# Altium PCB WX0.011.441PCB-4.2.PcbDoc (part 2 of 2)
Units mil, origin at the board's own origin, x right, y up, seen from the top; angles counter-clockwise.
Board outline 2922.34 x 6952.07 mil, 2 copper layers (Top Layer, Bottom Layer), stack 62.192 mil thick; 87 components, 60 nets, 354 pads, 196 vias.
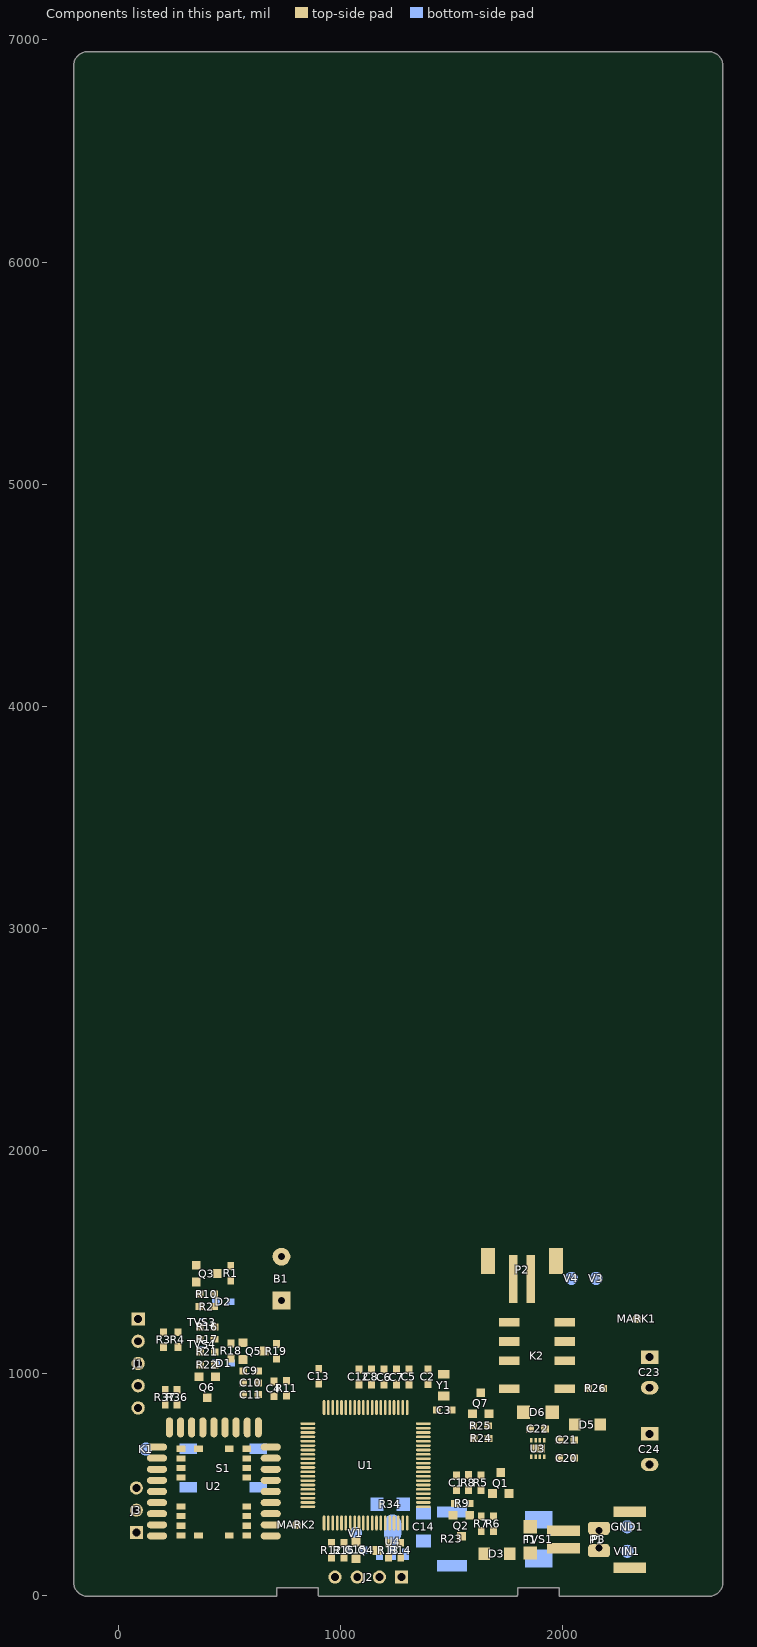
[diagram p2: the components of this part, seen from the top]

## Keep-outs
Keep-Out Layer:
  circle w5: c798,5374.03 r39.37
  circle w5: c2177,6777.03 r39.37
  circle w5: c798,3629.02 r39.37
  circle w5: c2177,5032.02 r39.37
  circle w5: c798,1884.01 r39.37
  circle w5: c2177,3287.01 r39.37
  circle w5: c2177,1542 r39.37
  circle w5: c798,139 r39.37
  circle w5: c2177,1542 r39.37
  circle w5: c798,139 r39.37
  circle w5: c2177,1542 r39.37
  circle w5: c798,139 r39.37
  lines w10: -196.31,59.97 -196.31,6882.02 cw(c-137.31,6882.99) -138.25,6941.98 ; -196.31,60.01 ccw(c-137.31,59.04) -138.25,0.05 ; -138.25,0 0,0 ; -138.25,6942.03 0,6942.03 0,0 ; 0.01,1369.01 104.73,1369.01 ; 0.01,1824.01 cw(c12.01,1759.01) 77.99,1755.07 ; 0.01,3114.01 104.73,3114.01 ; 0.01,3569.01 cw(c12.01,3504.01) 78,3500.08 ; 0.02,4859.02 104.74,4859.02 ; 0.02,5314.02 cw(c12.02,5249.02) 78,5245.08 ; 0.99,6942.03 79.03,6942.03 97.03,6942.03 2520.01,6942.03 ; 79.01,1755.07 79.01,1707.01 97.01,1707.01 2449.01,1707.01 2449.01,2097.01 2518.68,2097.01 ; 79.01,3500.08 79.01,3452.01 97.01,3452.01 2449.01,3452.01 2449.01,3842.01 2518.69,3842.01 ; 79.02,5245.08 79.02,5197.02 97.02,5197.02 2449.02,5197.02 2449.02,5587.02 2518.7,5587.02 ; 104.76,1368.65 ccw(c94.68,1487.2) 213.25,1477.28 213.24,1667.2 972.77,1667.21 972.77,1366.24 982.01,1357.01 1023.01,1357.01 1048.01,1332.01 1048.01,1191.01 1070.01,1169.01 1446.01,1169.01 1465.01,1188.01 1465.01,1322.01 1497.24,1354.24 1529.24,1354.24 1541.01,1366.01 1541.01,1667.01 2306.44,1667.01 2306.44,1479.08 ccw(c2425.01,1489.01) 2414.93,1370.46 ; 104.76,3113.66 ccw(c94.69,3232.21) 213.25,3222.28 213.25,3412.21 972.78,3412.21 972.78,3111.25 982.01,3102.01 1023.01,3102.01 1048.01,3077.01 1048.01,2936.01 1070.01,2914.01 1446.01,2914.01 1465.01,2933.01 1465.01,3067.01 1497.25,3099.25 1529.25,3099.25 1541.01,3111.01 1541.01,3412.01 2306.45,3412.01 2306.45,3224.09 ccw(c2425.01,3234.01) 2414.94,3115.46 ; 104.77,4858.67 ccw(c94.7,4977.22) 213.26,4967.29 213.26,5157.22 972.78,5157.22 972.78,4856.26 982.02,4847.02 1023.02,4847.02 1048.02,4822.02 1048.02,4681.02 1070.02,4659.02 1446.02,4659.02 1465.02,4678.02 1465.02,4812.02 1497.26,4844.26 1529.26,4844.26 1541.02,4856.02 1541.02,5157.01 2306.46,5157.01 2306.46,4969.09 ccw(c2425.02,4979.02) 2414.95,4860.47 ; 1541.03,6902.23 1541.03,6601.03 ; 2400.01,0.01 2519.68,0.01 ; 2414.96,1370.81 2519.68,1370.81 ; 2414.97,3115.82 2519.69,3115.82 ; 2414.98,4860.83 2519.7,4860.83 ; 2519.7,1745 2519.7,2182.7 ; 2519.71,3490.01 2519.71,3927.71 ; 2519.72,5235.02 2519.72,5672.72 ; 2657.94,-0.01 2519.69,-0.01 ; 2657.94,0.04 ccw(c2657.01,59.03) 2716,60 ; 2657.93,6941.98 cw(c2656.99,6882.99) 2715.99,6882.02 ; 2657.93,6942.03 2519.68,6942.03 2519.68,0.01 ; 2716,59.96 2716,6882.02 ; -0.01,141.82 0,141.81 ; -0.01,141.82 0,141.81 ; -0.01,141.82 0,141.81 ; -0.01,141.82 0,141.81 ; -0.01,141.82 0,141.81 ; -0.01,141.82 0,141.81 ; -0.01,141.82 0,141.81 ; -0.01,141.82 0,141.81 ; 0,0 129.92,0 ; 0.01,141.82 31.5,141.82 ; 0,141.81 31.5,141.81 ; 0.01,141.82 31.5,141.82 ; 0,141.81 31.5,141.81 ; 0,141.81 31.5,141.81 ; 0.01,141.82 31.5,141.82 ; 0.01,141.82 31.5,141.82 ; 0.01,1318.01 8.56,1326.56 ; 0,1318 8.55,1326.55 ; 0.01,1318.01 8.56,1326.56 ; 0,1318 8.55,1326.55 ; 0.01,1318.01 8.56,1326.56 ; 0,1318 8.55,1326.55 ; 0.01,1318.01 8.56,1326.56 ; 0,1318 8.55,1326.55 ; 0.01,1318.01 8.56,1326.56 ; 0,1318 8.55,1326.55 ; 0.01,1318.01 8.56,1326.56 ; 0,1318 8.55,1326.55 ; 0.01,1318.01 8.56,1326.56 ; 0,1318 8.55,1326.55 ; 0.01,1318.01 8.56,1326.56 ; 0,1318 8.55,1326.55 ; 0.03,6553.03 0.03,5376.84 31.53,5376.84 cw(c31.53,5278.42) 129.95,5278.42 129.95,5235.03 708.69,5235.03 708.69,5274.4 905.54,5274.4 905.54,5235.03 1791.37,5235.03 1791.37,5274.4 1988.22,5274.4 1988.22,5235.03 2404.03,5235.03 2404.03,5641.8 2510.8,5641.8 2519.72,5650.72 2519.72,5672.72 ; 0.03,6553.03 8.58,6561.58 ; 0.03,6553.03 8.58,6561.58 ; 8.56,1326.56 141.74,1326.56 ; 8.55,1326.55 141.73,1326.55 ; 8.56,1326.56 141.74,1326.56 ; 8.55,1326.55 141.73,1326.55 ; 8.56,1326.56 141.74,1326.56 ; 8.55,1326.55 141.73,1326.55 ; 8.56,1326.56 141.74,1326.56 ; 8.55,1326.55 141.73,1326.55 ; 8.56,1326.56 141.74,1326.56 ; 8.55,1326.55 141.73,1326.55 ; 8.56,1326.56 141.74,1326.56 ; 8.55,1326.55 141.73,1326.55 ; 8.56,1326.56 141.74,1326.56 ; 8.55,1326.55 141.73,1326.55 ; 8.56,1326.56 141.74,1326.56 ; 8.55,1326.55 141.73,1326.55 ; 8.58,6561.58 141.76,6561.58 ; 8.58,6561.58 141.76,6561.58 ; 31.5,141.82 cw(c31.5,43.39) 129.93,43.39 ; 31.5,141.81 cw(c31.5,43.39) 129.92,43.39 ; 31.5,141.82 cw(c31.5,43.39) 129.93,43.39 ; 31.5,141.81 cw(c31.5,43.39) 129.92,43.39 ; 31.5,141.82 cw(c31.5,43.39) 129.93,43.39 ; 31.5,141.81 cw(c31.5,43.39) 129.92,43.39 ; 31.5,141.82 cw(c31.5,43.39) 129.93,43.39 ; 31.5,141.81 cw(c31.5,43.39) 129.92,43.39 ; 31.5,141.82 cw(c31.5,43.39) 129.93,43.39 ; 31.5,141.81 cw(c31.5,43.39) 129.92,43.39 ; 31.5,141.82 cw(c31.5,43.39) 129.93,43.39 ; 31.5,141.81 cw(c31.5,43.39) 129.92,43.39 ; 31.5,141.82 cw(c31.5,43.39) 129.93,43.39 ; 31.5,141.81 cw(c31.5,43.39) 129.92,43.39 ; 31.5,141.82 cw(c31.5,43.39) 129.93,43.39 ; 31.5,141.81 cw(c31.5,43.39) 129.92,43.39 ; 129.93,0.01 129.93,43.39 ; 129.93,0.01 708.67,0.01 ; 129.92,0 129.92,43.39 ; 129.92,0 708.66,0 ; 129.93,0.01 129.93,43.39 ; 129.93,0.01 708.67,0.01 ; 129.92,0 129.92,43.39 ; 129.92,0 708.66,0 ; 129.93,0.01 129.93,43.39 ; 129.93,0.01 708.67,0.01 ; 129.92,0 129.92,43.39 ; 129.92,0 708.66,0 ; 129.93,0.01 129.93,43.39 ; 129.93,0.01 708.67,0.01 ; 129.92,0 129.92,43.39 ; 129.92,0 708.66,0 ; 129.93,0.01 129.93,43.39 ; 129.93,0.01 708.67,0.01 ; 129.92,0 129.92,43.39 ; 129.92,0 708.66,0 ; 129.93,0.01 129.93,43.39 ; 129.93,0.01 708.67,0.01 ; 129.92,0 129.92,43.39 ; 129.92,0 708.66,0 ; 129.93,0.01 129.93,43.39 ; 129.93,0.01 708.67,0.01 ; 129.92,0 129.92,43.39 ; 129.92,0 708.66,0 ; 129.93,0.01 129.93,43.39 ; 129.93,0.01 708.67,0.01 ; 129.92,0 129.92,43.39 ; 129.92,0 708.66,0 ; 141.74,1326.56 158.73,1327.81 ; 141.73,1326.55 158.72,1327.81 ; 141.74,1326.56 158.73,1327.81 ; 141.73,1326.55 158.72,1327.81 ; 141.74,1326.56 158.73,1327.81 ; 141.73,1326.55 158.72,1327.81 ; 141.74,1326.56 158.73,1327.81 ; 141.73,1326.55 158.72,1327.81 ; 141.74,1326.56 158.73,1327.81 ; 141.73,1326.55 158.72,1327.81 ; 141.74,1326.56 158.73,1327.81 ; 141.73,1326.55 158.72,1327.81 ; 141.74,1326.56 158.73,1327.81 ; 141.73,1326.55 158.72,1327.81 ; 141.74,1326.56 158.73,1327.81 ; 141.73,1326.55 158.72,1327.81 ; 141.76,6561.58 158.75,6562.84 ; 141.76,6561.58 158.75,6562.84 ; 158.73,1327.81 175.3,1331.79 ; 158.72,1327.81 175.29,1331.79 ; 158.73,1327.81 175.3,1331.79 ; 158.72,1327.81 175.29,1331.79 ; 158.73,1327.81 175.3,1331.79 ; 158.72,1327.81 175.29,1331.79 ; 158.73,1327.81 175.3,1331.79 ; 158.72,1327.81 175.29,1331.79 ; 158.73,1327.81 175.3,1331.79 ; 158.72,1327.81 175.29,1331.79 ; 158.73,1327.81 175.3,1331.79 ; 158.72,1327.81 175.29,1331.79 ; 158.73,1327.81 175.3,1331.79 ; 158.72,1327.81 175.29,1331.79 ; 158.73,1327.81 175.3,1331.79 ; 158.72,1327.81 175.29,1331.79 ; 158.75,6562.84 175.32,6566.81 ; 158.75,6562.84 175.32,6566.81 ; 175.29,1331.79 191.04,1338.31 ; 175.29,1331.79 191.04,1338.31 ; 175.29,1331.79 191.04,1338.31 ; 175.29,1331.79 191.04,1338.31 ; 175.29,1331.79 191.04,1338.31 ; 175.29,1331.79 191.04,1338.31 ; 175.29,1331.79 191.04,1338.31 ; 175.29,1331.79 191.04,1338.31 ; 175.3,1331.79 191.04,1338.31 ; 175.3,1331.79 191.04,1338.31 ; 175.3,1331.79 191.04,1338.31 ; 175.3,1331.79 191.04,1338.31 ; 175.3,1331.79 191.04,1338.31 ; 175.3,1331.79 191.04,1338.31 ; 175.3,1331.79 191.04,1338.31 ; 175.3,1331.79 191.04,1338.31 ; 175.32,6566.81 191.07,6573.34 ; 175.32,6566.81 191.07,6573.34 ; 191.04,1338.31 205.57,1347.22 ; 191.04,1338.31 205.57,1347.21 ; 191.04,1338.31 205.57,1347.22 ; 191.04,1338.31 205.57,1347.21 ; 191.04,1338.31 205.57,1347.22 ; 191.04,1338.31 205.57,1347.21 ; 191.04,1338.31 205.57,1347.22 ; 191.04,1338.31 205.57,1347.21 ; 191.04,1338.31 205.57,1347.22 ; 191.04,1338.31 205.57,1347.21 ; 191.04,1338.31 205.57,1347.22 ; 191.04,1338.31 205.57,1347.21 ; 191.04,1338.31 205.57,1347.22 ; 191.04,1338.31 205.57,1347.21 ; 191.04,1338.31 205.57,1347.22 ; 191.04,1338.31 205.57,1347.21 ; 191.07,6573.34 205.6,6582.24 ; 191.07,6573.34 205.6,6582.24 ; 205.57,1347.22 218.53,1358.29 ; 205.57,1347.21 218.53,1358.28 ; 205.57,1347.22 218.53,1358.29 ; 205.57,1347.21 218.53,1358.28 ; 205.57,1347.22 218.53,1358.29 ; 205.57,1347.21 218.53,1358.28 ; 205.57,1347.22 218.53,1358.29 ; 205.57,1347.21 218.53,1358.28 ; 205.57,1347.22 218.53,1358.29 ; 205.57,1347.21 218.53,1358.28 ; 205.57,1347.22 218.53,1358.29 ; 205.57,1347.21 218.53,1358.28 ; 205.57,1347.22 218.53,1358.29 ; 205.57,1347.21 218.53,1358.28 ; 205.57,1347.22 218.53,1358.29 ; 205.57,1347.21 218.53,1358.28 ; 205.6,6582.24 218.55,6593.31 ; 205.6,6582.24 218.55,6593.31 ; 213.27,6712.3 cw(c94.7,6722.23) 104.78,6603.67 ccw(c94.7,6722.23) 213.27,6712.3 ; 213.27,6712.3 213.27,6902.23 ; 213.27,6712.3 213.27,6902.23 ; 213.27,6902.23 972.79,6902.23 ; 218.53,1358.29 229.6,1371.24 ; 218.53,1358.28 229.59,1371.24 ; 218.53,1358.29 229.6,1371.24 ; 218.53,1358.28 229.59,1371.24 ; 218.53,1358.29 229.6,1371.24 ; 218.53,1358.28 229.59,1371.24 ; 218.53,1358.29 229.6,1371.24 ; 218.53,1358.28 229.59,1371.24 ; 218.53,1358.29 229.6,1371.24 ; 218.53,1358.28 229.59,1371.24 ; 218.53,1358.29 229.6,1371.24 ; 218.53,1358.28 229.59,1371.24 ; 218.53,1358.29 229.6,1371.24 ; 218.53,1358.28 229.59,1371.24 ; 218.53,1358.29 229.6,1371.24 ; 218.53,1358.28 229.59,1371.24 ; 218.55,6593.31 229.62,6606.27 ; 218.55,6593.31 229.62,6606.27 ; 229.59,1371.24 238.5,1385.77 ; 229.59,1371.24 238.5,1385.77 ; 229.59,1371.24 238.5,1385.77 ; 229.59,1371.24 238.5,1385.77 ; 229.59,1371.24 238.5,1385.77 ; 229.59,1371.24 238.5,1385.77 ; 229.59,1371.24 238.5,1385.77 ; 229.59,1371.24 238.5,1385.77 ; 229.6,1371.24 238.5,1385.78 ; 229.6,1371.24 238.5,1385.78 ; 229.6,1371.24 238.5,1385.78 ; 229.6,1371.24 238.5,1385.78 ; 229.6,1371.24 238.5,1385.78 ; 229.6,1371.24 238.5,1385.78 ; 229.6,1371.24 238.5,1385.78 ; 229.6,1371.24 238.5,1385.78 ; 229.62,6606.27 238.53,6620.8 ; 229.62,6606.27 238.53,6620.8 ; 238.5,1385.77 245.02,1401.51 ; 238.5,1385.77 245.02,1401.51 ; 238.5,1385.77 245.02,1401.51 ; 238.5,1385.77 245.02,1401.51 ; 238.5,1385.77 245.02,1401.51 ; 238.5,1385.77 245.02,1401.51 ; 238.5,1385.77 245.02,1401.51 ; 238.5,1385.77 245.02,1401.51 ; 238.5,1385.78 245.03,1401.52 ; 238.5,1385.78 245.03,1401.52 ; 238.5,1385.78 245.03,1401.52 ; 238.5,1385.78 245.03,1401.52 ; 238.5,1385.78 245.03,1401.52 ; 238.5,1385.78 245.03,1401.52 ; 238.5,1385.78 245.03,1401.52 ; 238.5,1385.78 245.03,1401.52 ; 238.53,6620.8 245.05,6636.54 ; 238.53,6620.8 245.05,6636.54 ; 245.03,1401.52 249,1418.09 ; 245.02,1401.51 249,1418.08 ; 245.03,1401.52 249,1418.09 ; 245.02,1401.51 249,1418.08 ; 245.03,1401.52 249,1418.09 ; 245.02,1401.51 249,1418.08 ; 245.03,1401.52 249,1418.09 ; 245.02,1401.51 249,1418.08 ; 245.03,1401.52 249,1418.09 ; 245.02,1401.51 249,1418.08 ; 245.03,1401.52 249,1418.09 ; 245.02,1401.51 249,1418.08 ; 245.03,1401.52 249,1418.09 ; 245.02,1401.51 249,1418.08 ; 245.03,1401.52 249,1418.09 ; 245.02,1401.51 249,1418.08 ; 245.05,6636.54 249.03,6653.11 ; 245.05,6636.54 249.03,6653.11 ; 249,1418.09 250.01,1435.08 ; 249,1418.08 250,1435.07 ; 249,1418.09 250.01,1435.08 ; 249,1418.08 250,1435.07 ; 249,1418.09 250.01,1435.08 ; 249,1418.08 250,1435.07 ; 249,1418.09 250.01,1435.08 ; 249,1418.08 250,1435.07 ; 249,1418.09 250.01,1435.08 ; 249,1418.08 250,1435.07 ; 249,1418.09 250.01,1435.08 ; 249,1418.08 250,1435.07 ; 249,1418.09 250.01,1435.08 ; 249,1418.08 250,1435.07 ; 249,1418.09 250.01,1435.08 ; 249,1418.08 250,1435.07 ; 249.03,6653.11 250.03,6670.1 ; 249.03,6653.11 250.03,6670.1 ; 250.01,1435.08 250.01,1619.01 ; 250,1435.07 250,1619 ; 250.01,1435.08 250.01,1619.01 ; 250,1435.07 250,1619 ; 250.01,1435.08 250.01,1619.01 ; 250,1435.07 250,1619 ; 250.01,1435.08 250.01,1619.01 ; 250,1435.07 250,1619 ; 250.01,1435.08 250.01,1619.01 ; 250,1435.07 250,1619 ; 250.01,1435.08 250.01,1619.01 ; 250,1435.07 250,1619 ; 250.01,1435.08 250.01,1619.01 ; 250,1435.07 250,1619 ; 250.01,1435.08 250.01,1619.01 ; 250,1435.07 250,1619 ; 250.01,1619.01 261.01,1630.01 ; 250,1619 261,1630 ; 250.01,1619.01 261.01,1630.01 ; 250,1619 261,1630 ; 250.01,1619.01 261.01,1630.01 ; 250,1619 261,1630 ; 250.01,1619.01 261.01,1630.01 ; 250,1619 261,1630 ; 250.01,1619.01 261.01,1630.01 ; 250,1619 261,1630 ; 250.01,1619.01 261.01,1630.01 ; 250,1619 261,1630 ; 250.01,1619.01 261.01,1630.01 ; 250,1619 261,1630 ; 250.01,1619.01 261.01,1630.01 ; 250,1619 261,1630 ; 250.03,6670.1 250.03,6854.03 ; 250.03,6670.1 250.03,6854.03 ; 250.03,6854.03 261.03,6865.03 ; 250.03,6854.03 261.03,6865.03 ; 261.01,1630.01 915.01,1630.01 ; 261,1630 915,1630 ; 261.01,1630.01 915.01,1630.01 ; 261,1630 915,1630 ; 261.01,1630.01 915.01,1630.01 ; 261,1630 915,1630 ; 261.01,1630.01 915.01,1630.01 ; 261,1630 915,1630 ; 261.01,1630.01 915.01,1630.01 ; 261,1630 915,1630 ; 261.01,1630.01 915.01,1630.01 ; 261,1630 915,1630 ; 261.01,1630.01 915.01,1630.01 ; 261,1630 915,1630 ; 261.01,1630.01 915.01,1630.01 ; 261,1630 915,1630 ; 261.03,6865.03 915.03,6865.03 ; 261.03,6865.03 915.03,6865.03 ; 708.67,0.01 708.67,39.38 ; 708.66,0 708.66,39.37 ; 708.67,0.01 708.67,39.38 ; 708.66,0 708.66,39.37 ; 708.67,0.01 708.67,39.38 ; 708.66,0 708.66,39.37 ; 708.67,0.01 708.67,39.38 ; 708.66,0 708.66,39.37 ; 708.67,0.01 708.67,39.38 ; 708.66,0 708.66,39.37 ; 708.67,0.01 708.67,39.38 ; 708.66,0 708.66,39.37 ; 708.67,0.01 708.67,39.38 ; 708.66,0 708.66,39.37 ; 708.67,0.01 708.67,39.38 ; 708.66,0 708.66,39.37 ; 708.66,39.37 905.51,39.37 ; 708.66,39.37 905.51,39.37 ; 708.66,39.37 905.51,39.37 ; 708.66,39.37 905.51,39.37 ; 708.66,39.37 905.51,39.37 ; 708.66,39.37 905.51,39.37 ; 708.66,39.37 905.51,39.37 ; 708.66,39.37 905.51,39.37 ; 708.67,39.38 905.52,39.38 ; 708.67,39.38 905.52,39.38 ; 708.67,39.38 905.52,39.38 ; 708.67,39.38 905.52,39.38 ; 708.67,39.38 905.52,39.38 ; 708.67,39.38 905.52,39.38 ; 708.67,39.38 905.52,39.38 ; 708.67,39.38 905.52,39.38 ; 905.52,0.01 905.52,39.38 ; 905.52,0.01 1791.35,0.01 ; 905.51,0 905.51,39.37 ; 905.51,0 1791.34,0 ; 905.52,0.01 905.52,39.38 ; 905.52,0.01 1791.35,0.01 ; 905.51,0 905.51,39.37 ; 905.51,0 1791.34,0 ; 905.52,0.01 905.52,39.38 ; 905.52,0.01 1791.35,0.01 ; 905.51,0 905.51,39.37 ; 905.51,0 1791.34,0 ; 905.52,0.01 905.52,39.38 ; 905.52,0.01 1791.35,0.01 ; 905.51,0 905.51,39.37 ; 905.51,0 1791.34,0 ; 905.52,0.01 905.52,39.38 ; 905.52,0.01 1791.35,0.01 ; 905.51,0 905.51,39.37 ; 905.51,0 1791.34,0 ; 905.52,0.01 905.52,39.38 ; 905.52,0.01 1791.35,0.01 ; 905.51,0 905.51,39.37 ; 905.51,0 1791.34,0 ; 905.52,0.01 905.52,39.38 ; 905.52,0.01 1791.35,0.01 ; 905.51,0 905.51,39.37 ; 905.51,0 1791.34,0 ; 905.52,0.01 905.52,39.38 ; 905.52,0.01 1791.35,0.01 ; 905.51,0 905.51,39.37 ; 905.51,0 1791.34,0 ; 915.01,1630.01 925.2,1619.81 ; 915,1630 925.2,1619.8 ; 915.01,1630.01 925.2,1619.81 ; 915,1630 925.2,1619.8 ; 915.01,1630.01 925.2,1619.81 ; 915,1630 925.2,1619.8 ; 915.01,1630.01 925.2,1619.81 ; 915,1630 925.2,1619.8 ; 915.01,1630.01 925.2,1619.81 ; 915,1630 925.2,1619.8 ; 915.01,1630.01 925.2,1619.81 ; 915,1630 925.2,1619.8 ; 915.01,1630.01 925.2,1619.81 ; 915,1630 925.2,1619.8 ; 915.01,1630.01 925.2,1619.81 ; 915,1630 925.2,1619.8 ; 915.03,6865.03 925.23,6854.83 ; 915.03,6865.03 925.23,6854.83 ; 925.2,1326.81 936.97,1315.05 ; 925.2,1326.81 925.2,1619.81 ; 925.2,1326.8 936.96,1315.04 ; 925.2,1326.8 925.2,1619.8 ; 925.2,1326.81 936.97,1315.05 ; 925.2,1326.81 925.2,1619.81 ; 925.2,1326.8 936.96,1315.04 ; 925.2,1326.8 925.2,1619.8 ; 925.2,1326.81 936.97,1315.05 ; 925.2,1326.81 925.2,1619.81 ; 925.2,1326.8 936.96,1315.04 ; 925.2,1326.8 925.2,1619.8 ; 925.2,1326.81 936.97,1315.05 ; 925.2,1326.81 925.2,1619.81 ; 925.2,1326.8 936.96,1315.04 ; 925.2,1326.8 925.2,1619.8 ; 925.2,1326.81 936.97,1315.05 ; 925.2,1326.81 925.2,1619.81 ; 925.2,1326.8 936.96,1315.04 ; 925.2,1326.8 925.2,1619.8 ; 925.2,1326.81 936.97,1315.05 ; 925.2,1326.81 925.2,1619.81 ; 925.2,1326.8 936.96,1315.04 ; 925.2,1326.8 925.2,1619.8 ; 925.2,1326.81 936.97,1315.05 ; 925.2,1326.81 925.2,1619.81 ; 925.2,1326.8 936.96,1315.04 ; 925.2,1326.8 925.2,1619.8 ; 925.2,1326.81 936.97,1315.05 ; 925.2,1326.81 925.2,1619.81 ; 925.2,1326.8 936.96,1315.04 ; 925.2,1326.8 925.2,1619.8 ; 925.23,6561.83 925.23,6854.83 ; 925.23,6561.83 936.99,6550.07 ; 925.23,6561.83 936.99,6550.07 ; 925.23,6561.83 925.23,6854.83 ; 936.97,1315.05 991.97,1315.05 ; 936.96,1315.04 991.96,1315.04 ; 936.97,1315.05 991.97,1315.05 ; 936.96,1315.04 991.96,1315.04 ; 936.97,1315.05 991.97,1315.05 ; 936.96,1315.04 991.96,1315.04 ; 936.97,1315.05 991.97,1315.05 ; 936.96,1315.04 991.96,1315.04 ; 936.97,1315.05 991.97,1315.05 ; 936.96,1315.04 991.96,1315.04 ; 936.97,1315.05 991.97,1315.05 ; 936.96,1315.04 991.96,1315.04 ; 936.97,1315.05 991.97,1315.05 ; 936.96,1315.04 991.96,1315.04 ; 936.97,1315.05 991.97,1315.05 ; 936.96,1315.04 991.96,1315.04 ; 936.99,6550.07 991.99,6550.07 ; 936.99,6550.07 991.99,6550.07 ; 972.79,6601.27 972.79,6902.23 ; 972.79,6601.27 982.03,6592.03 ; 972.79,6601.27 982.03,6592.03 ; 972.79,6601.27 972.79,6902.23 ; 982.03,6592.03 1023.03,6592.03 ; 982.03,6592.03 1023.03,6592.03 ; 991.97,1315.05 1003.94,1303.07 ; 991.96,1315.04 1003.94,1303.06 ; 991.97,1315.05 1003.94,1303.07 ; 991.96,1315.04 1003.94,1303.06 ; 991.97,1315.05 1003.94,1303.07 ; 991.96,1315.04 1003.94,1303.06 ; 991.97,1315.05 1003.94,1303.07 ; 991.96,1315.04 1003.94,1303.06 ; 991.97,1315.05 1003.94,1303.07 ; 991.96,1315.04 1003.94,1303.06 ; 991.97,1315.05 1003.94,1303.07 ; 991.96,1315.04 1003.94,1303.06 ; 991.97,1315.05 1003.94,1303.07 ; 991.96,1315.04 1003.94,1303.06 ; 991.97,1315.05 1003.94,1303.07 ; 991.96,1315.04 1003.94,1303.06 ; 991.99,6550.07 1003.97,6538.09 ; 991.99,6550.07 1003.97,6538.09 ; 1003.94,1166.07 1045.96,1124.06 ; 1003.94,1166.07 1003.94,1303.07 ; 1003.94,1166.06 1045.95,1124.05 ; 1003.94,1166.06 1003.94,1303.06 ; 1003.94,1166.07 1045.96,1124.06 ; 1003.94,1166.07 1003.94,1303.07 ; 1003.94,1166.06 1045.95,1124.05 ; 1003.94,1166.06 1003.94,1303.06 ; 1003.94,1166.07 1045.96,1124.06 ; 1003.94,1166.07 1003.94,1303.07 ; 1003.94,1166.06 1045.95,1124.05 ; 1003.94,1166.06 1003.94,1303.06 ; 1003.94,1166.07 1045.96,1124.06 ; 1003.94,1166.07 1003.94,1303.07 ; 1003.94,1166.06 1045.95,1124.05 ; 1003.94,1166.06 1003.94,1303.06 ; 1003.94,1166.07 1045.96,1124.06 ; 1003.94,1166.07 1003.94,1303.07 ; 1003.94,1166.06 1045.95,1124.05 ; 1003.94,1166.06 1003.94,1303.06 ; 1003.94,1166.07 1045.96,1124.06 ; 1003.94,1166.07 1003.94,1303.07 ; 1003.94,1166.06 1045.95,1124.05 ; 1003.94,1166.06 1003.94,1303.06 ; 1003.94,1166.07 1045.96,1124.06 ; 1003.94,1166.07 1003.94,1303.07 ; 1003.94,1166.06 1045.95,1124.05 ; 1003.94,1166.06 1003.94,1303.06 ; 1003.94,1166.07 1045.96,1124.06 ; 1003.94,1166.07 1003.94,1303.07 ; 1003.94,1166.06 1045.95,1124.05 ; 1003.94,1166.06 1003.94,1303.06 ; 1003.97,6401.09 1003.97,6538.09 ; 1003.97,6401.09 1045.98,6359.08 ; 1003.97,6401.09 1045.98,6359.08 ; 1003.97,6401.09 1003.97,6538.09 ; 1023.03,6592.03 1048.03,6567.03 ; 1023.03,6592.03 1048.03,6567.03 ; 1045.96,1124.06 1476.06,1124.06 ; 1045.95,1124.05 1476.05,1124.05 ; 1045.96,1124.06 1476.06,1124.06 ; 1045.95,1124.05 1476.05,1124.05 ; 1045.96,1124.06 1476.06,1124.06 ; 1045.95,1124.05 1476.05,1124.05 ; 1045.96,1124.06 1476.06,1124.06 ; 1045.95,1124.05 1476.05,1124.05 ; 1045.96,1124.06 1476.06,1124.06 ; 1045.95,1124.05 1476.05,1124.05 ; 1045.96,1124.06 1476.06,1124.06 ; 1045.95,1124.05 1476.05,1124.05 ; 1045.96,1124.06 1476.06,1124.06 ; 1045.95,1124.05 1476.05,1124.05 ; 1045.96,1124.06 1476.06,1124.06 ; 1045.95,1124.05 1476.05,1124.05 ; 1045.98,6359.08 1476.08,6359.08 ; 1045.98,6359.08 1476.08,6359.08 ; 1048.03,6426.03 1070.03,6404.03 ; 1048.03,6426.03 1048.03,6567.03 ; 1048.03,6426.03 1048.03,6567.03 ; 1048.03,6426.03 1070.03,6404.03 ; 1070.03,6404.03 1446.03,6404.03 ; 1070.03,6404.03 1446.03,6404.03 ; 1446.03,6404.03 1465.03,6423.03 ; 1446.03,6404.03 1465.03,6423.03 ; 1465.03,6423.03 1465.03,6557.03 ; 1465.03,6423.03 1465.03,6557.03 ; 1465.03,6557.03 1497.27,6589.27 ; 1465.03,6557.03 1497.27,6589.27 ; 1476.06,1124.06 1515.76,1163.76 ; 1476.05,1124.05 1515.75,1163.75 ; 1476.06,1124.06 1515.76,1163.76 ; 1476.05,1124.05 1515.75,1163.75 ; 1476.06,1124.06 1515.76,1163.76 ; 1476.05,1124.05 1515.75,1163.75 ; 1476.06,1124.06 1515.76,1163.76 ; 1476.05,1124.05 1515.75,1163.75 ; 1476.06,1124.06 1515.76,1163.76 ; 1476.05,1124.05 1515.75,1163.75 ; 1476.06,1124.06 1515.76,1163.76 ; 1476.05,1124.05 1515.75,1163.75 ; 1476.06,1124.06 1515.76,1163.76 ; 1476.05,1124.05 1515.75,1163.75 ; 1476.06,1124.06 1515.76,1163.76 ; 1476.05,1124.05 1515.75,1163.75 ; 1476.08,6359.08 1515.78,6398.78 ; 1476.08,6359.08 1515.78,6398.78 ; 1497.27,6589.27 1529.27,6589.27 ; 1497.27,6589.27 1529.27,6589.27 ; 1515.76,1163.76 1515.76,1300.76 ; 1515.75,1163.75 1515.75,1300.75 ; 1515.76,1163.76 1515.76,1300.76 ; 1515.75,1163.75 1515.75,1300.75 ; 1515.76,1163.76 1515.76,1300.76 ; 1515.75,1163.75 1515.75,1300.75 ; 1515.76,1163.76 1515.76,1300.76 ; 1515.75,1163.75 1515.75,1300.75 ; 1515.76,1163.76 1515.76,1300.76 ; 1515.75,1163.75 1515.75,1300.75 ; 1515.76,1163.76 1515.76,1300.76 ; 1515.75,1163.75 1515.75,1300.75 ; 1515.76,1163.76 1515.76,1300.76 ; 1515.75,1163.75 1515.75,1300.75 ; 1515.76,1163.76 1515.76,1300.76 ; 1515.75,1163.75 1515.75,1300.75 ; 1515.76,1300.76 1530.05,1315.05 ; 1515.75,1300.75 1530.04,1315.04 ; 1515.76,1300.76 1530.05,1315.05 ; 1515.75,1300.75 1530.04,1315.04 ; 1515.76,1300.76 1530.05,1315.05 ; 1515.75,1300.75 1530.04,1315.04 ; 1515.76,1300.76 1530.05,1315.05 ; 1515.75,1300.75 1530.04,1315.04 ; 1515.76,1300.76 1530.05,1315.05 ; 1515.75,1300.75 1530.04,1315.04 ; 1515.76,1300.76 1530.05,1315.05 ; 1515.75,1300.75 1530.04,1315.04 ; 1515.76,1300.76 1530.05,1315.05 ; 1515.75,1300.75 1530.04,1315.04 ; 1515.76,1300.76 1530.05,1315.05 ; 1515.75,1300.75 1530.04,1315.04 ; 1515.78,6398.78 1515.78,6535.78 ; 1515.78,6398.78 1515.78,6535.78 ; 1515.78,6535.78 1530.07,6550.07 ; 1515.78,6535.78 1530.07,6550.07 ; 1529.27,6589.27 1541.03,6601.03 ; 1529.27,6589.27 1541.03,6601.03 ; 1530.04,1315.04 1581.04,1315.04 ; 1530.04,1315.04 1581.04,1315.04 ; 1530.04,1315.04 1581.04,1315.04 ; 1530.04,1315.04 1581.04,1315.04 ; 1530.04,1315.04 1581.04,1315.04 ; 1530.04,1315.04 1581.04,1315.04 ; 1530.04,1315.04 1581.04,1315.04 ; 1530.04,1315.04 1581.04,1315.04 ; 1530.05,1315.05 1581.05,1315.05 ; 1530.05,1315.05 1581.05,1315.05 ; 1530.05,1315.05 1581.05,1315.05 ; 1530.05,1315.05 1581.05,1315.05 ; 1530.05,1315.05 1581.05,1315.05 ; 1530.05,1315.05 1581.05,1315.05 ; 1530.05,1315.05 1581.05,1315.05 ; 1530.05,1315.05 1581.05,1315.05 ; 1530.07,6550.07 1581.07,6550.07 ; 1530.07,6550.07 1581.07,6550.07 ; 1541.03,6601.03 1541.03,6902.01 2306.47,6902.01 ; 1581.04,1315.04 1594.49,1328.49 ; 1581.04,1315.04 1594.49,1328.49 ; 1581.04,1315.04 1594.49,1328.49 ; 1581.04,1315.04 1594.49,1328.49 ; 1581.04,1315.04 1594.49,1328.49 ; 1581.04,1315.04 1594.49,1328.49 ; 1581.04,1315.04 1594.49,1328.49 ; 1581.04,1315.04 1594.49,1328.49 ; 1581.05,1315.05 1594.5,1328.5 ; 1581.05,1315.05 1594.5,1328.5 ; 1581.05,1315.05 1594.5,1328.5 ; 1581.05,1315.05 1594.5,1328.5 ; 1581.05,1315.05 1594.5,1328.5 ; 1581.05,1315.05 1594.5,1328.5 ; 1581.05,1315.05 1594.5,1328.5 ; 1581.05,1315.05 1594.5,1328.5 ; 1581.07,6550.07 1594.52,6563.52 ; 1581.07,6550.07 1594.52,6563.52 ; 1594.49,1328.49 1594.49,1617.49 ; 1594.49,1328.49 1594.49,1617.49 ; 1594.49,1328.49 1594.49,1617.49 ; 1594.49,1328.49 1594.49,1617.49 ; 1594.49,1328.49 1594.49,1617.49 ; 1594.49,1328.49 1594.49,1617.49 ; 1594.49,1328.49 1594.49,1617.49 ; 1594.49,1328.49 1594.49,1617.49 ; 1594.49,1617.49 1607,1630 ; 1594.49,1617.49 1607,1630 ; 1594.49,1617.49 1607,1630 ; 1594.49,1617.49 1607,1630 ; 1594.49,1617.49 1607,1630 ; 1594.49,1617.49 1607,1630 ; 1594.49,1617.49 1607,1630 ; 1594.49,1617.49 1607,1630 ; 1594.5,1328.5 1594.5,1617.5 ; 1594.5,1328.5 1594.5,1617.5 ; 1594.5,1328.5 1594.5,1617.5 ; 1594.5,1328.5 1594.5,1617.5 ; 1594.5,1328.5 1594.5,1617.5 ; 1594.5,1328.5 1594.5,1617.5 ; 1594.5,1328.5 1594.5,1617.5 ; 1594.5,1328.5 1594.5,1617.5 ; 1594.5,1617.5 1607.01,1630.01 ; 1594.5,1617.5 1607.01,1630.01 ; 1594.5,1617.5 1607.01,1630.01 ; 1594.5,1617.5 1607.01,1630.01 ; 1594.5,1617.5 1607.01,1630.01 ; 1594.5,1617.5 1607.01,1630.01 ; 1594.5,1617.5 1607.01,1630.01 ; 1594.5,1617.5 1607.01,1630.01 ; 1594.52,6563.52 1594.52,6852.52 ; 1594.52,6563.52 1594.52,6852.52 ; 1594.52,6852.52 1607.03,6865.03 ; 1594.52,6852.52 1607.03,6865.03 ; 1607.01,1630.01 2257.01,1630.01 ; 1607,1630 2257,1630 ; 1607.01,1630.01 2257.01,1630.01 ; 1607,1630 2257,1630 ; 1607.01,1630.01 2257.01,1630.01 ; 1607,1630 2257,1630 ; 1607.01,1630.01 2257.01,1630.01 ; 1607,1630 2257,1630 ; 1607.01,1630.01 2257.01,1630.01 ; 1607,1630 2257,1630 ; 1607.01,1630.01 2257.01,1630.01 ; 1607,1630 2257,1630 ; 1607.01,1630.01 2257.01,1630.01 ; 1607,1630 2257,1630 ; 1607.01,1630.01 2257.01,1630.01 ; 1607,1630 2257,1630 ; 1607.03,6865.03 2257.03,6865.03 ; 1607.03,6865.03 2257.03,6865.03 ; 1791.34,0 1791.34,39.37 ; 1791.34,0 1791.34,39.37 ; 1791.34,0 1791.34,39.37 ; 1791.34,0 1791.34,39.37 ; 1791.34,0 1791.34,39.37 ; 1791.34,0 1791.34,39.37 ; 1791.34,0 1791.34,39.37 ; 1791.34,0 1791.34,39.37 ; 1791.34,39.37 1988.19,39.37 ; 1791.34,39.37 1988.19,39.37 ; 1791.34,39.37 1988.19,39.37 ; 1791.34,39.37 1988.19,39.37 ; 1791.34,39.37 1988.19,39.37 ; 1791.34,39.37 1988.19,39.37 ; 1791.34,39.37 1988.19,39.37 ; 1791.34,39.37 1988.19,39.37 ; 1791.35,0.01 1791.35,39.38 ; 1791.35,0.01 1791.35,39.38 ; 1791.35,0.01 1791.35,39.38 ; 1791.35,0.01 1791.35,39.38 ; 1791.35,0.01 1791.35,39.38 ; 1791.35,0.01 1791.35,39.38 ; 1791.35,0.01 1791.35,39.38 ; 1791.35,0.01 1791.35,39.38 ; 1791.35,39.38 1988.2,39.38 ; 1791.35,39.38 1988.2,39.38 ; 1791.35,39.38 1988.2,39.38 ; 1791.35,39.38 1988.2,39.38 ; 1791.35,39.38 1988.2,39.38 ; 1791.35,39.38 1988.2,39.38 ; 1791.35,39.38 1988.2,39.38 ; 1791.35,39.38 1988.2,39.38 ; 1988.19,0 2404,0 ; 1988.19,0 1988.19,39.37 ; 1988.19,0 2404,0 ; 1988.19,0 1988.19,39.37 ; 1988.19,0 2404,0 ; 1988.19,0 1988.19,39.37 ; 1988.19,0 2404,0 ; 1988.19,0 1988.19,39.37 ; 1988.19,0 2404,0 ; 1988.19,0 1988.19,39.37 ; 1988.19,0 2404,0 ; 1988.19,0 1988.19,39.37 ; 1988.19,0 2404,0 ; 1988.19,0 1988.19,39.37 ; 1988.19,0 2404,0 ; 1988.19,0 1988.19,39.37 ; 1988.2,0.01 2404.01,0.01 ; 1988.2,0.01 1988.2,39.38 ; 1988.2,0.01 2404.01,0.01 ; 1988.2,0.01 1988.2,39.38 ; 1988.2,0.01 2404.01,0.01 ; 1988.2,0.01 1988.2,39.38 ; 1988.2,0.01 2404.01,0.01 ; 1988.2,0.01 1988.2,39.38 ; 1988.2,0.01 2404.01,0.01 ; 1988.2,0.01 1988.2,39.38 ; 1988.2,0.01 2404.01,0.01 ; 1988.2,0.01 1988.2,39.38 ; 1988.2,0.01 2404.01,0.01 ; 1988.2,0.01 1988.2,39.38 ; 1988.2,0.01 2404.01,0.01 ; 1988.2,0.01 1988.2,39.38 ; 2257.01,1630.01 2269.44,1617.57 ; 2257,1630 2269.44,1617.56 ; 2257.01,1630.01 2269.44,1617.57 ; 2257,1630 2269.44,1617.56 ; 2257.01,1630.01 2269.44,1617.57 ; 2257,1630 2269.44,1617.56 ; 2257.01,1630.01 2269.44,1617.57 ; 2257,1630 2269.44,1617.56 ; 2257.01,1630.01 2269.44,1617.57 ; 2257,1630 2269.44,1617.56 ; 2257.01,1630.01 2269.44,1617.57 ; 2257,1630 2269.44,1617.56 ; 2257.01,1630.01 2269.44,1617.57 ; 2257,1630 2269.44,1617.56 ; 2257.01,1630.01 2269.44,1617.57 ; 2257,1630 2269.44,1617.56 ; 2257.03,6865.03 2269.47,6852.59 ; 2257.03,6865.03 2269.47,6852.59 ; 2269.44,1435.08 2270.7,1418.09 ; 2269.44,1435.08 2269.44,1617.57 ; 2269.44,1435.07 2270.69,1418.08 ; 2269.44,1435.07 2269.44,1617.56 ; 2269.44,1435.08 2270.7,1418.09 ; 2269.44,1435.08 2269.44,1617.57 ; 2269.44,1435.07 2270.69,1418.08 ; 2269.44,1435.07 2269.44,1617.56 ; 2269.44,1435.08 2270.7,1418.09 ; 2269.44,1435.08 2269.44,1617.57 ; 2269.44,1435.07 2270.69,1418.08 ; 2269.44,1435.07 2269.44,1617.56 ; 2269.44,1435.08 2270.7,1418.09 ; 2269.44,1435.08 2269.44,1617.57 ; 2269.44,1435.07 2270.69,1418.08 ; 2269.44,1435.07 2269.44,1617.56 ; 2269.44,1435.08 2270.7,1418.09 ; 2269.44,1435.08 2269.44,1617.57 ; 2269.44,1435.07 2270.69,1418.08 ; 2269.44,1435.07 2269.44,1617.56 ; 2269.44,1435.08 2270.7,1418.09 ; 2269.44,1435.08 2269.44,1617.57 ; 2269.44,1435.07 2270.69,1418.08 ; 2269.44,1435.07 2269.44,1617.56 ; 2269.44,1435.08 2270.7,1418.09 ; 2269.44,1435.08 2269.44,1617.57 ; 2269.44,1435.07 2270.69,1418.08 ; 2269.44,1435.07 2269.44,1617.56 ; 2269.44,1435.08 2270.7,1418.09 ; 2269.44,1435.08 2269.44,1617.57 ; 2269.44,1435.07 2270.69,1418.08 ; 2269.44,1435.07 2269.44,1617.56 ; 2269.47,6670.1 2269.47,6852.59 ; 2269.47,6670.1 2270.72,6653.11 ; 2269.47,6670.1 2270.72,6653.11 ; 2269.47,6670.1 2269.47,6852.59 ; 2270.69,1418.08 2274.67,1401.51 ; 2270.69,1418.08 2274.67,1401.51 ; 2270.69,1418.08 2274.67,1401.51 ; 2270.69,1418.08 2274.67,1401.51 ; 2270.69,1418.08 2274.67,1401.51 ; 2270.69,1418.08 2274.67,1401.51 ; 2270.69,1418.08 2274.67,1401.51 ; 2270.69,1418.08 2274.67,1401.51 ; 2270.7,1418.09 2274.67,1401.52 ; 2270.7,1418.09 2274.67,1401.52 ; 2270.7,1418.09 2274.67,1401.52 ; 2270.7,1418.09 2274.67,1401.52 ; 2270.7,1418.09 2274.67,1401.52 ; 2270.7,1418.09 2274.67,1401.52 ; 2270.7,1418.09 2274.67,1401.52 ; 2270.7,1418.09 2274.67,1401.52 ; 2270.72,6653.11 2274.7,6636.54 ; 2270.72,6653.11 2274.7,6636.54 ; 2274.67,1401.52 2281.2,1385.78 ; 2274.67,1401.51 2281.19,1385.77 ; 2274.67,1401.52 2281.2,1385.78 ; 2274.67,1401.51 2281.19,1385.77 ; 2274.67,1401.52 2281.2,1385.78 ; 2274.67,1401.51 2281.19,1385.77 ; 2274.67,1401.52 2281.2,1385.78 ; 2274.67,1401.51 2281.19,1385.77 ; 2274.67,1401.52 2281.2,1385.78 ; 2274.67,1401.51 2281.19,1385.77 ; 2274.67,1401.52 2281.2,1385.78 ; 2274.67,1401.51 2281.19,1385.77 ; 2274.67,1401.52 2281.2,1385.78 ; 2274.67,1401.51 2281.19,1385.77 ; 2274.67,1401.52 2281.2,1385.78 ; 2274.67,1401.51 2281.19,1385.77 ; 2274.7,6636.54 2281.22,6620.8 ; 2274.7,6636.54 2281.22,6620.8 ; 2281.19,1385.77 2290.09,1371.24 ; 2281.19,1385.77 2290.09,1371.24 ; 2281.19,1385.77 2290.09,1371.24 ; 2281.19,1385.77 2290.09,1371.24 ; 2281.19,1385.77 2290.09,1371.24 ; 2281.19,1385.77 2290.09,1371.24 ; 2281.19,1385.77 2290.09,1371.24 ; 2281.19,1385.77 2290.09,1371.24 ; 2281.2,1385.78 2290.1,1371.24 ; 2281.2,1385.78 2290.1,1371.24 ; 2281.2,1385.78 2290.1,1371.24 ; 2281.2,1385.78 2290.1,1371.24 ; 2281.2,1385.78 2290.1,1371.24 ; 2281.2,1385.78 2290.1,1371.24 ; 2281.2,1385.78 2290.1,1371.24 ; 2281.2,1385.78 2290.1,1371.24 ; 2281.22,6620.8 2290.12,6606.27 ; 2281.22,6620.8 2290.12,6606.27 ; 2290.09,1371.24 2301.16,1358.28 ; 2290.09,1371.24 2301.16,1358.28 ; 2290.09,1371.24 2301.16,1358.28 ; 2290.09,1371.24 2301.16,1358.28 ; 2290.09,1371.24 2301.16,1358.28 ; 2290.09,1371.24 2301.16,1358.28 ; 2290.09,1371.24 2301.16,1358.28 ; 2290.09,1371.24 2301.16,1358.28 ; 2290.1,1371.24 2301.17,1358.29 ; 2290.1,1371.24 2301.17,1358.29 ; 2290.1,1371.24 2301.17,1358.29 ; 2290.1,1371.24 2301.17,1358.29 ; 2290.1,1371.24 2301.17,1358.29 ; 2290.1,1371.24 2301.17,1358.29 ; 2290.1,1371.24 2301.17,1358.29 ; 2290.1,1371.24 2301.17,1358.29 ; 2290.12,6606.27 2301.19,6593.31 ; 2290.12,6606.27 2301.19,6593.31 ; 2301.17,1358.29 2314.13,1347.22 ; 2301.16,1358.28 2314.12,1347.21 ; 2301.17,1358.29 2314.13,1347.22 ; 2301.16,1358.28 2314.12,1347.21 ; 2301.17,1358.29 2314.13,1347.22 ; 2301.16,1358.28 2314.12,1347.21 ; 2301.17,1358.29 2314.13,1347.22 ; 2301.16,1358.28 2314.12,1347.21 ; 2301.17,1358.29 2314.13,1347.22 ; 2301.16,1358.28 2314.12,1347.21 ; 2301.17,1358.29 2314.13,1347.22 ; 2301.16,1358.28 2314.12,1347.21 ; 2301.17,1358.29 2314.13,1347.22 ; 2301.16,1358.28 2314.12,1347.21 ; 2301.17,1358.29 2314.13,1347.22 ; 2301.16,1358.28 2314.12,1347.21 ; 2301.19,6593.31 2314.15,6582.24 ; 2301.19,6593.31 2314.15,6582.24 ; 2306.47,6714.1 ccw(c2425.03,6724.03) 2414.95,6605.48 cw(c2425.03,6724.03) 2306.47,6714.1 ; 2306.47,6714.1 2306.47,6902.01 ; 2306.47,6714.1 2306.47,6902.01 ; 2314.13,1347.22 2328.66,1338.31 ; 2314.12,1347.21 2328.65,1338.31 ; 2314.13,1347.22 2328.66,1338.31 ; 2314.12,1347.21 2328.65,1338.31 ; 2314.13,1347.22 2328.66,1338.31 ; 2314.12,1347.21 2328.65,1338.31 ; 2314.13,1347.22 2328.66,1338.31 ; 2314.12,1347.21 2328.65,1338.31 ; 2314.13,1347.22 2328.66,1338.31 ; 2314.12,1347.21 2328.65,1338.31 ; 2314.13,1347.22 2328.66,1338.31 ; 2314.12,1347.21 2328.65,1338.31 ; 2314.13,1347.22 2328.66,1338.31 ; 2314.12,1347.21 2328.65,1338.31 ; 2314.13,1347.22 2328.66,1338.31 ; 2314.12,1347.21 2328.65,1338.31 ; 2314.15,6582.24 2328.68,6573.34 ; 2314.15,6582.24 2328.68,6573.34 ; 2328.66,1338.31 2344.4,1331.79 ; 2328.65,1338.31 2344.39,1331.79 ; 2328.66,1338.31 2344.4,1331.79 ; 2328.65,1338.31 2344.39,1331.79 ; 2328.66,1338.31 2344.4,1331.79 ; 2328.65,1338.31 2344.39,1331.79 ; 2328.66,1338.31 2344.4,1331.79 ; 2328.65,1338.31 2344.39,1331.79 ; 2328.66,1338.31 2344.4,1331.79 ; 2328.65,1338.31 2344.39,1331.79 ; 2328.66,1338.31 2344.4,1331.79 ; 2328.65,1338.31 2344.39,1331.79 ; 2328.66,1338.31 2344.4,1331.79 ; 2328.65,1338.31 2344.39,1331.79 ; 2328.66,1338.31 2344.4,1331.79 ; 2328.65,1338.31 2344.39,1331.79 ; 2328.68,6573.34 2344.42,6566.81 ; 2328.68,6573.34 2344.42,6566.81 ; 2344.39,1331.79 2360.97,1327.81 ; 2344.39,1331.79 2360.97,1327.81 ; 2344.39,1331.79 2360.97,1327.81 ; 2344.39,1331.79 2360.97,1327.81 ; 2344.39,1331.79 2360.97,1327.81 ; 2344.39,1331.79 2360.97,1327.81 ; 2344.39,1331.79 2360.97,1327.81 ; 2344.39,1331.79 2360.97,1327.81 ; 2344.4,1331.79 2360.97,1327.81 ; 2344.4,1331.79 2360.97,1327.81 ; 2344.4,1331.79 2360.97,1327.81 ; 2344.4,1331.79 2360.97,1327.81 ; 2344.4,1331.79 2360.97,1327.81 ; 2344.4,1331.79 2360.97,1327.81 ; 2344.4,1331.79 2360.97,1327.81 ; 2344.4,1331.79 2360.97,1327.81 ; 2344.42,6566.81 2360.99,6562.84 ; 2344.42,6566.81 2360.99,6562.84 ; 2360.97,1327.81 2377.96,1326.81 ; 2360.97,1327.81 2377.95,1326.8 ; 2360.97,1327.81 2377.96,1326.81 ; 2360.97,1327.81 2377.95,1326.8 ; 2360.97,1327.81 2377.96,1326.81 ; 2360.97,1327.81 2377.95,1326.8 ; 2360.97,1327.81 2377.96,1326.81 ; 2360.97,1327.81 2377.95,1326.8 ; 2360.97,1327.81 2377.96,1326.81 ; 2360.97,1327.81 2377.95,1326.8 ; 2360.97,1327.81 2377.96,1326.81 ; 2360.97,1327.81 2377.95,1326.8 ; 2360.97,1327.81 2377.96,1326.81 ; 2360.97,1327.81 2377.95,1326.8 ; 2360.97,1327.81 2377.96,1326.81 ; 2360.97,1327.81 2377.95,1326.8 ; 2360.99,6562.84 2377.98,6561.83 ; 2360.99,6562.84 2377.98,6561.83 ; 2377.96,1326.81 2508.2,1326.81 ; 2377.95,1326.8 2508.2,1326.8 ; 2377.96,1326.81 2508.2,1326.81 ; 2377.95,1326.8 2508.2,1326.8 ; 2377.96,1326.81 2508.2,1326.81 ; 2377.95,1326.8 2508.2,1326.8 ; 2377.96,1326.81 2508.2,1326.81 ; 2377.95,1326.8 2508.2,1326.8 ; 2377.96,1326.81 2508.2,1326.81 ; 2377.95,1326.8 2508.2,1326.8 ; 2377.96,1326.81 2508.2,1326.81 ; 2377.95,1326.8 2508.2,1326.8 ; 2377.96,1326.81 2508.2,1326.81 ; 2377.95,1326.8 2508.2,1326.8 ; 2377.96,1326.81 2508.2,1326.81 ; 2377.95,1326.8 2508.2,1326.8 ; 2377.98,6561.83 2508.22,6561.83 ; 2377.98,6561.83 2508.22,6561.83 ; 2404.01,0.01 2404.01,406.77 ; 2404,0 2404,406.77 ; 2404.01,0.01 2404.01,406.77 ; 2404,0 2404,406.77 ; 2404.01,0.01 2404.01,406.77 ; 2404,0 2404,406.77 ; 2404.01,0.01 2404.01,406.77 ; 2404,0 2404,406.77 ; 2404.01,0.01 2404.01,406.77 ; 2404,0 2404,406.77 ; 2404.01,0.01 2404.01,406.77 ; 2404,0 2404,406.77 ; 2404.01,0.01 2404.01,406.77 ; 2404,0 2404,406.77 ; 2404.01,0.01 2404.01,406.77 ; 2404,0 2404,406.77 ; 2404,406.77 2510.77,406.77 ; 2404,406.77 2510.77,406.77 ; 2404,406.77 2510.77,406.77 ; 2404,406.77 2510.77,406.77 ; 2404,406.77 2510.77,406.77 ; 2404,406.77 2510.77,406.77 ; 2404,406.77 2510.77,406.77 ; 2404,406.77 2510.77,406.77 ; 2404.01,406.77 2510.77,406.77 ; 2404.01,406.77 2510.77,406.77 ; 2404.01,406.77 2510.77,406.77 ; 2404.01,406.77 2510.77,406.77 ; 2404.01,406.77 2510.77,406.77 ; 2404.01,406.77 2510.77,406.77 ; 2404.01,406.77 2510.77,406.77 ; 2404.01,406.77 2510.77,406.77 ; 2508.2,1326.8 2519.69,1315.31 ; 2508.2,1326.8 2519.69,1315.31 ; 2508.2,1326.8 2519.69,1315.31 ; 2508.2,1326.8 2519.69,1315.31 ; 2508.2,1326.8 2519.69,1315.31 ; 2508.2,1326.8 2519.69,1315.31 ; 2508.2,1326.8 2519.69,1315.31 ; 2508.2,1326.8 2519.69,1315.31 ; 2508.2,1326.81 2519.69,1315.32 ; 2508.2,1326.81 2519.69,1315.32 ; 2508.2,1326.81 2519.69,1315.32 ; 2508.2,1326.81 2519.69,1315.32 ; 2508.2,1326.81 2519.69,1315.32 ; 2508.2,1326.81 2519.69,1315.32 ; 2508.2,1326.81 2519.69,1315.32 ; 2508.2,1326.81 2519.69,1315.32 ; 2508.22,6561.83 2519.72,6550.34 ; 2508.22,6561.83 2519.72,6550.34 ; 2510.77,406.77 2519.69,415.69 ; 2510.77,406.77 2519.69,415.69 ; 2510.77,406.77 2519.69,415.69 ; 2510.77,406.77 2519.69,415.69 ; 2510.77,406.77 2519.69,415.69 ; 2510.77,406.77 2519.69,415.69 ; 2510.77,406.77 2519.69,415.69 ; 2510.77,406.77 2519.69,415.69 ; 2510.77,406.77 2519.69,415.69 ; 2510.77,406.77 2519.69,415.69 ; 2510.77,406.77 2519.69,415.69 ; 2510.77,406.77 2519.69,415.69 ; 2510.77,406.77 2519.69,415.69 ; 2510.77,406.77 2519.69,415.69 ; 2510.77,406.77 2519.69,415.69 ; 2510.77,406.77 2519.69,415.69 ; 2519.69,-0.01 2519.69,437.69 ; 2519.69,415.69 2519.69,437.69 ; 2519.69,415.69 2519.69,437.69 ; 2519.69,415.69 2519.69,437.69 ; 2519.69,415.69 2519.69,437.69 ; 2519.69,415.69 2519.69,437.69 ; 2519.69,415.69 2519.69,437.69 ; 2519.69,415.69 2519.69,437.69 ; 2519.69,415.69 2519.69,437.69 ; 2519.69,415.69 2519.69,437.69 ; 2519.69,415.69 2519.69,437.69 ; 2519.69,415.69 2519.69,437.69 ; 2519.69,415.69 2519.69,437.69 ; 2519.69,415.69 2519.69,437.69 ; 2519.69,415.69 2519.69,437.69 ; 2519.69,415.69 2519.69,437.69 ; 2519.69,415.69 2519.69,437.69 ; 2519.69,437.69 2519.69,1315.32 ; 2519.69,437.69 2519.69,1315.31 ; 2519.69,437.69 2519.69,1315.32 ; 2519.69,437.69 2519.69,1315.31 ; 2519.69,437.69 2519.69,1315.32 ; 2519.69,437.69 2519.69,1315.31 ; 2519.69,437.69 2519.69,1315.32 ; 2519.69,437.69 2519.69,1315.31 ; 2519.69,437.69 2519.69,1315.32 ; 2519.69,437.69 2519.69,1315.31 ; 2519.69,437.69 2519.69,1315.32 ; 2519.69,437.69 2519.69,1315.31 ; 2519.69,437.69 2519.69,1315.32 ; 2519.69,437.69 2519.69,1315.31 ; 2519.69,437.69 2519.69,1315.32 ; 2519.69,437.69 2519.69,1315.31 ; 2519.7,2182.7 2519.7,3060.33 2508.21,3071.82 2377.97,3071.82 2360.98,3072.82 2344.41,3076.8 2328.66,3083.32 2314.13,3092.23 2301.18,3103.29 2290.11,3116.25 2281.2,3130.78 2274.68,3146.53 2270.7,3163.1 2269.45,3180.09 2269.45,3362.58 2257.01,3375.02 1607.02,3375.02 1594.5,3362.5 1594.5,3073.5 1581.05,3060.05 1530.05,3060.05 1515.76,3045.76 1515.76,2908.76 1476.06,2869.06 1045.97,2869.06 1003.95,2911.08 1003.95,3048.08 991.97,3060.05 936.97,3060.05 925.21,3071.82 925.21,3364.82 915.01,3375.02 261.02,3375.02 250.01,3364.01 250.01,3180.09 249.01,3163.1 245.03,3146.53 238.51,3130.78 229.61,3116.25 218.54,3103.29 205.58,3092.23 191.05,3083.32 175.31,3076.8 158.74,3072.82 141.75,3071.57 8.57,3071.57 0.01,3063.01 0.01,1886.83 31.51,1886.83 cw(c31.51,1788.4) 129.94,1788.4 129.94,1745.01 708.68,1745.01 708.68,1784.38 905.53,1784.38 905.53,1745.01 1791.36,1745.01 1791.36,1784.38 1988.21,1784.38 1988.21,1745.01 2404.01,1745.01 2404.01,2151.78 2510.78,2151.78 2519.7,2160.7 2519.7,2182.7 ; 2519.71,3927.71 2519.71,3905.71 2510.79,3896.79 2404.02,3896.79 2404.02,3490.02 1988.21,3490.02 1988.21,3529.39 1791.36,3529.39 1791.36,3490.02 905.54,3490.02 905.54,3529.39 708.68,3529.39 708.68,3490.02 129.94,3490.02 129.94,3533.41 ccw(c31.52,3533.41) 31.52,3631.83 0.02,3631.83 0.02,4808.02 8.58,4816.58 141.75,4816.58 158.74,4817.83 175.31,4821.81 191.06,4828.33 205.59,4837.23 218.55,4848.3 229.62,4861.26 238.52,4875.79 245.04,4891.53 249.02,4908.11 250.02,4925.09 250.02,5109.02 261.02,5120.02 915.02,5120.02 925.22,5109.82 925.22,4816.82 936.98,4805.06 991.98,4805.06 1003.96,4793.08 1003.96,4656.09 1045.97,4614.07 1476.07,4614.07 1515.77,4653.77 1515.77,4790.77 1530.06,4805.06 1581.06,4805.06 1594.51,4818.51 1594.51,5107.51 1607.02,5120.02 2257.02,5120.02 2269.46,5107.59 2269.46,4925.09 2270.71,4908.11 2274.69,4891.53 2281.21,4875.79 2290.12,4861.26 2301.18,4848.3 2314.14,4837.23 2328.67,4828.33 2344.42,4821.81 2360.99,4817.83 2377.98,4816.83 2508.22,4816.83 2519.71,4805.34 2519.71,3927.71 ; 2519.72,5672.72 2519.72,6550.34 ; 0.03,6604.03 104.75,6604.03 0.03,6604.03 ; 2414.98,6605.83 2519.7,6605.83 2414.98,6605.83

## Other copper
Top Layer:
  rectangle net GND: 1964,147 2053,215
  rectangle net GND: 2312,383 2343,482
  rectangle net V3.6: 1911.5,688.5 1973.5,707.5
  rectangle net VCC: 1911.5,613.5 1977.5,632.5
  rectangle net GND: 1823.5,689.5 1857.5,706.5
  pour cut-out: 1666.25,517 1666.25,496 1761,496 1761,517
  pour cut-out: 1548.25,326 1548.25,305 1597.75,305 1597.75,326
  region net VIN: 1883,241.01 1825,241 1800,266.01 1800,342 1795,347 1758,347 1736,325 1735.99,159.99 1883,160
  region net VIN1: 1826.99,345.99 2198,346 2212,332 2212,279 2199,266 1835,266 1823,277.99 1823,342
  pour cut-out: 1509.59,955.32 1509.59,936.26 1489.74,936.26 1485,941 1485,956
  pour cut-out: 20.35,242.17 886,242.17 886,-1 1.71,-1 1.35,-1.36 1.35,242
  region net VCC: 1177,888 1206,888 1206,936 1183.56,936 1177,929.43
  region net NetD3_2: 1514,216 1636,216 1636,160.01 1623.99,148 1542,148 1537,143 1537,61 1534,58 1460,58 1458,60 1458,160
  pour cut-out: 1826.99,366.38 1826.37,367 1804,367 1804,360 1827,360
  region net NetC22_2: 1883.5,688.5 1883.5,729.5 1864.5,748.5 1847.51,748.5 1847.5,734.49 1871.5,710.51 1871.5,688.5
  region net NetC22_1: 1891.5,688.5 1891.5,729.5 1910.5,748.5 1928.5,748.5 1928.5,735.49 1903.5,710.51 1903.5,688.5
  pour cut-out: 1692,1018 1692,1284.3 2072.55,1284.3 2072.55,1018
  region net NetK2_6: 1663.01,1306 1636.25,1279.25 1636.25,1222 1676.25,1222 1676.25,1262.01 1685.24,1271 1762,1271 1797,1306
Bottom Layer:
  rectangle net GND: 365,1238 385,1271
  rectangle net GND: 365,1087 385,1120
  region net NetD3_2: 1457.33,118 1537,118 1537,60 1534.42,57.42 1459.41,57.39 1457.85,58.93
  pour cut-out: 18.03,243 886,243 886,-0.17 -0.61,-0.17 -0.97,-0.53 -0.97,242.83
  region net VIN: 1776,349 1954,348.99 1954,277.01 1946,269.01 1776.01,269 1756,289 1756,329

## Silkscreen, mask and mechanical layers (free items; w line width, h text height)
Top Overlay:
  text "阀" at 2025,1515 h110
  text "+" at 855,1247 h118.11
  text "R" at 179,1220 h60 r90
  text "C" at 177,1129 h60 r90
  text "I" at 181,1048 h60 r90
  text "G" at 180,932 h60 r90
  text "V" at 181,835 h60 r90
  text "+" at 1936,352 h118.11
  text "S" at 1328,49 h60
  text "R" at 1366,48.36 h60
  text "T" at 1404,48.36 h60
  text "G" at 1442,49 h60
  text "电池" at 2132,18 h100
Bottom Overlay:
  circle w1: c472.85,572.89 r314.96
  rectangle: 2231,149 2251,353
  text "R" at 173,1225 h60
  text "C" at 178,1136 h60
  text "I" at 167,1033 h60
  text "102010405-XXXX" at 1638,987 h80
  text "G" at 181,937 h60
  text "WX0.011.441PCB-4.1" at 1638,925 h80
  text "2025-06-23" at 1638.08,862 h80
  text "V" at 179,845 h60
  text "V1" at 1637.92,805 h80
  text "WLW5-P5-FK" at 808,764 h80 r270
  text "T" at 191,467 h60 r90
  text "R" at 191,409 h60 r90
  text "G" at 192,345 h60 r90
  text "-" at 2349,283 h118.11
  text "+" at 2023,272 h118.11
  text "-" at 2030,172 h118.11
  text "+" at 2340,160 h118.11
  text "S" at 777,48 h60
  text "R" at 820.62,47.36 h60
  text "T" at 857.51,47.36 h60
  text "G" at 903,48 h60
Mechanical 28:
  circle w1: c472.85,1320.92 r59.06
  circle w1: c473,1045 r118.11

## Text inside footprints (layer, text, board x,y; h text height)
B1: Bottom Overlay "+" at 842,1253 h80 r270
C23: Bottom Overlay "+" at 2433,1044 h78.74 r270; Bottom Overlay "-" at 2431,908 h78.74 r270
C24: Bottom Overlay "+" at 2433,697.05 h78.74 r270; Bottom Overlay "-" at 2431,559.25 h78.74 r270